# EAGLE board DIDV_-_Conector_DIDV_BEEB (EAGLE 6.2)
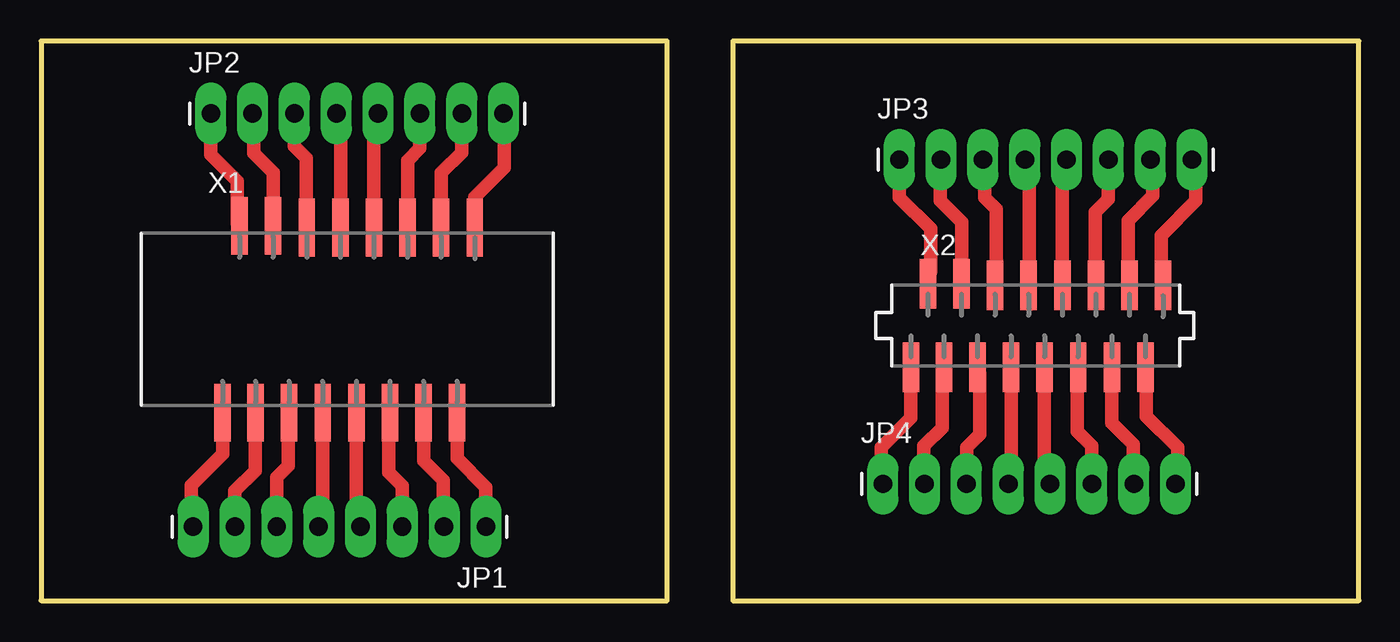
[diagram p0: board, top side]

Size 80 x 34 mm. Coordinates in mm from the lower left corner, seen from the top.
Outline: 0,0 38,0 38,34 0,34 0,0
Outline: 42,0 80,0 80,34 42,34 42,0
Copper layers (1*16): Top 0.035mm / dielectric 1.5mm / Bottom 0.035mm
Design rules: minimum track width 10mil, minimum drill 24mil, track to track 8mil, track to pad 8mil, pad to pad 8mil, via to via 8mil, smd to smd 8mil, copper to edge 40mil, drill to drill 8mil, minimum pad ring 10mil, minimum via ring 8mil, stop-mask expansion 4mil, vias tented up to drill 0mil, thermal gap 10mil

## Footprints (pad centres in the part's own frame; a part is rotated, then mirrored left to right if it is on the bottom)
1X08_LONGPADS = drill 1.118 pad 1.88 long: 1 0,0; 2 2.54,0; 3 5.08,0; 4 7.62,0; 5 10.16,0; 6 12.7,0; 7 15.24,0; 8 17.78,0
SMDTOP16 = smd 1 x 3.5: 1 -7.755,-5.675; 2 -6.725,5.675; 3 -5.755,-5.675; 4 -4.685,5.675; 5 -3.715,-5.675; 6 -2.645,5.575; 7 -1.675,-5.675; 8 -0.605,5.575; 9 0.365,-5.675; 10 1.435,5.575; 11 2.405,-5.675; 12 3.475,5.575; 13 4.445,-5.675; 14 5.515,5.575; 15 6.485,-5.675; 16 7.555,5.575
SMDTOP16' = smd 1 x 3: 1 -10.755,-2.54; 2 -9.725,2.54; 3 -8.755,-2.54; 4 -7.685,2.54; 5 -6.715,-2.54; 6 -5.645,2.44; 7 -4.675,-2.54; 8 -3.605,2.44; 9 -2.635,-2.54; 10 -1.565,2.44; 11 -0.595,-2.54; 12 0.475,2.44; 13 1.445,-2.54; 14 2.515,2.44; 15 3.485,-2.54; 16 4.555,2.44

## Placement (x,y rotation side)
JP1  [1X08_LONGPADS]  27,4.5 180 top
JP2  [1X08_LONGPADS]  10.3,29.6 0 top
JP3  [1X08_LONGPADS]  52.1,26.8 0 top
JP4  [1X08_LONGPADS]  51.1,7.1 0 top
X1  [SMDTOP16]  18.77,17.1 0 top
X2  [SMDTOP16']  63.56,16.72 0 top

## Library data of the parts
JP1-JP4 = SparkFun-Connectors
X1 = con-iriso2
X2 = con-iriso1

## Nets
N$1: JP1.8 X1.1
N$2: JP1.1 X1.15
N$3: JP1.7 X1.3
N$4: JP1.6 X1.5
N$5: JP1.5 X1.7
N$6: JP1.2 X1.13
N$7: JP1.3 X1.11
N$8: JP1.4 X1.9
N$9: JP2.7 X1.14
N$12: JP2.6 X1.12
N$13: JP2.5 X1.10
N$14: JP2.2 X1.4
N$15: JP2.3 X1.6
N$16: JP2.4 X1.8
N$17: X2.1
N$18: X2.15
N$19: X2.3
N$20: X2.5
N$21: X2.7
N$22: X2.13
N$23: X2.11
N$24: X2.9
N$25: X2.2
N$26: X2.16
N$27: X2.14
N$28: X2.12
N$29: X2.10
N$30: X2.4
N$31: X2.6
N$32: X2.8
N$33: JP2.1 X1.2
N$34: JP2.8 X1.16

## Tracks (layer width: path | path; a pad name or v marks a point on that pad's centre or on a via)
N$1
  Top 0.813: X1.1 11.02,8.91 9.1,7 9.1,4.62 JP1.8
N$2
  Top 0.813: X1.15 25.25,8.64 27,6.9 JP1.1
N$3
  Top 0.813: JP1.7 11.76,6.66 13,7.9 13,11.41 X1.3
N$4
  Top 0.813: JP1.6 14.3,7.5 15,8.2 15,11.37 X1.5
N$5
  Top 0.813: X1.7 17.09,4.75 JP1.5
N$6
  Top 0.813: X1.13 23.21,8.48 24.4,7.3 24.4,4.56 JP1.2
N$7
  Top 0.813: JP1.3 21.92,6.98 21.1,7.8 21.1,11.35 X1.11
N$8
  Top 0.813: X1.9 19.14,4.75 JP1.4
N$9
  Top 0.813: JP2.7 25.54,27.24 24.3,26 X1.14
N$12
  Top 0.813: X1.12 22.25,26.75 23,27.5 JP2.6
N$13
  Top 0.813: X1.10 20.2,29.34 JP2.5
N$14
  Top 0.813: X1.4 14.09,26.02 12.9,27.2 12.9,29.54 JP2.2
N$15
  Top 0.813: JP2.3 15.38,27.62 16.1,26.9 16.1,22.7 X1.6
N$16
  Top 0.813: X1.8 18.2,22.68 18.2,29.32 JP2.4
N$33
  Top 0.813: JP2.1 10.3,27.1 11.9,25.5 11.9,22.92 X1.2
N$34
  Top 0.813: X1.16 26.32,24.52 28.1,26.3 28.1,29.58 JP2.8
S$1
  Top 0.813: 60,18 60,26
S$2
  Top 0.813: 62,20 62,26
S$3
  Top 0.813: 64,20 64,23.6 64.8,24.4 64.8,26.7
S$4
  Top 0.813: 66,20 66,23.1 67.5,24.6 67.5,26.5 67.3,26.7
S$5
  Top 0.813: 68,20 68,22.2 70.1,24.3 70.1,26.8 70,26.9
S$6
  Top 0.813: 58,20 58,23.8 57.3,24.5 57.3,26.6 57.1,26.8
S$7
  Top 0.813: 55.9,19.3 55.9,23 54.6,24.3 54.6,26.7 54.7,26.8
S$8
  Top 0.813: 54,20 54,22.6 52.1,24.5 52.1,26.7 52.2,26.8
S$9
  Top 0.813: 60.9,13.8 60.9,7.4 61.4,6.9
S$10
  Top 0.813: 58.9,13.6 58.9,7.1
S$11
  Top 0.813: 62.9,13.8 62.9,10.3 63.8,9.4 63.8,7.7 64.2,7.3
S$12
  Top 0.813: 65,14.3 65,10.8 66.3,9.5 66.3,7.4 66.6,7.1
S$13
  Top 0.813: 67.1,14.3 67.1,11.2 69,9.3 69,7.3
S$14
  Top 0.813: 57,13.8 57,10.1 56.2,9.3 56.2,7.3 56.1,7.2
S$15
  Top 0.813: 54.7,14.1 54.7,10.5 53.6,9.4 53.6,7.7 53.9,7.4
S$16
  Top 0.813: 52.8,14.2 52.8,11.1 51,9.3 51,7.4 51.3,7.1